# Altium PCB INVERTER_USE_555_IC.PcbDoc
Units mil, origin at the board's own origin, x right, y up, seen from the top; angles counter-clockwise.
Board outline 3400 x 1800 mil, 2 copper layers (Top Layer, Bottom Layer); 17 components, 12 nets, 49 pads, 0 vias.
Unrouted connection lines stored in the file: 12.
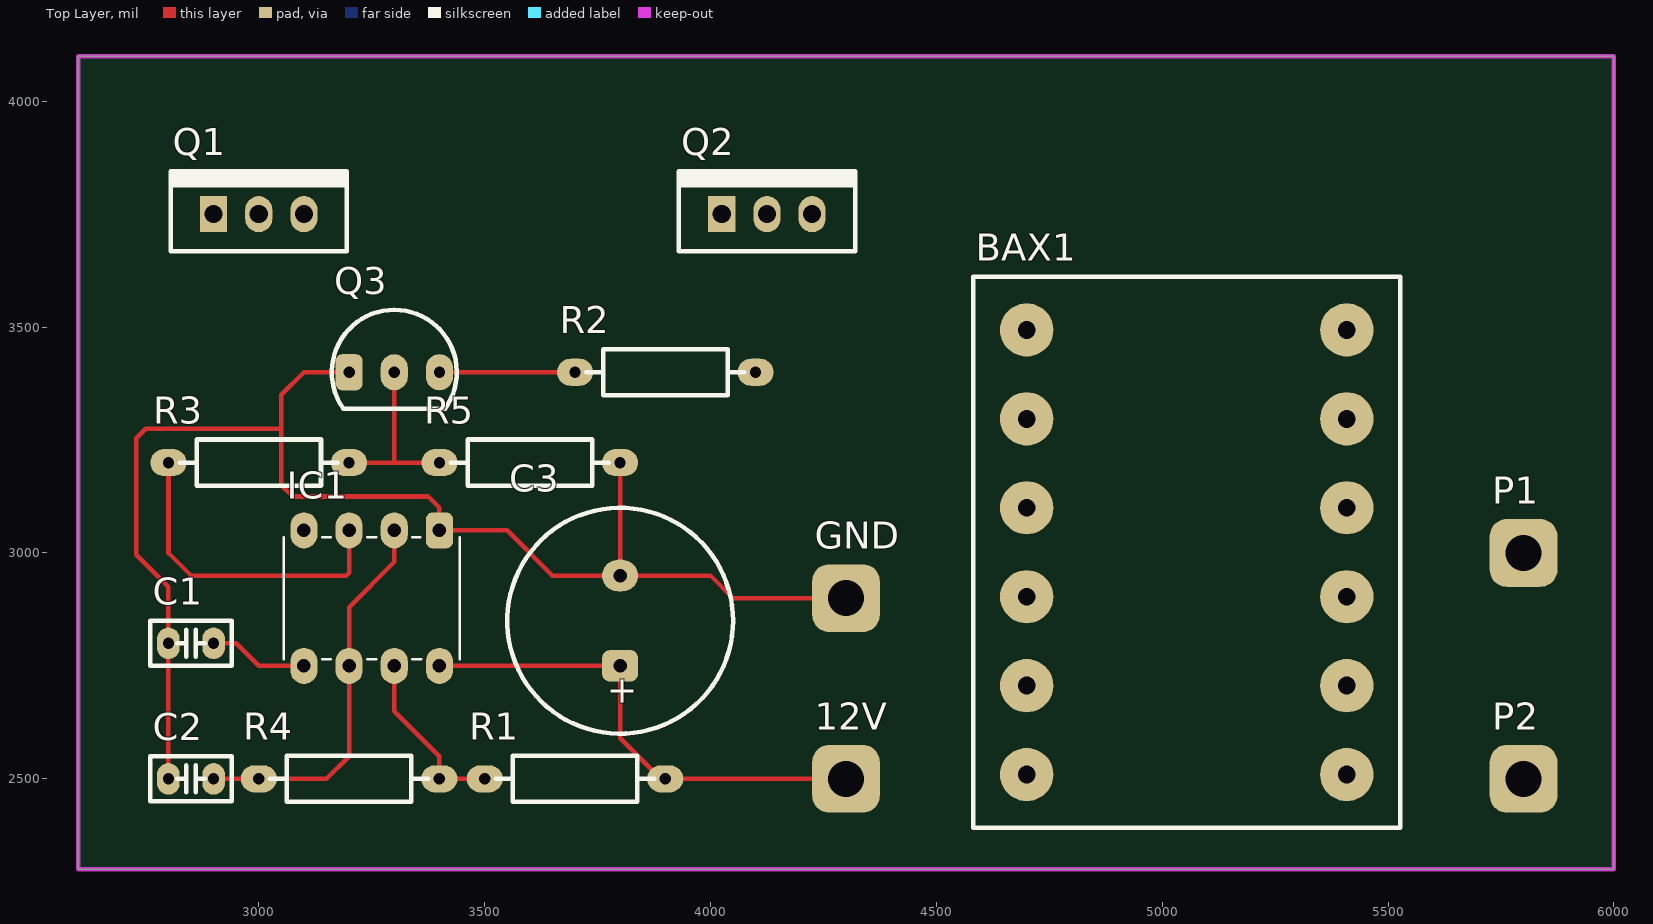
[diagram p0: Top Layer view]
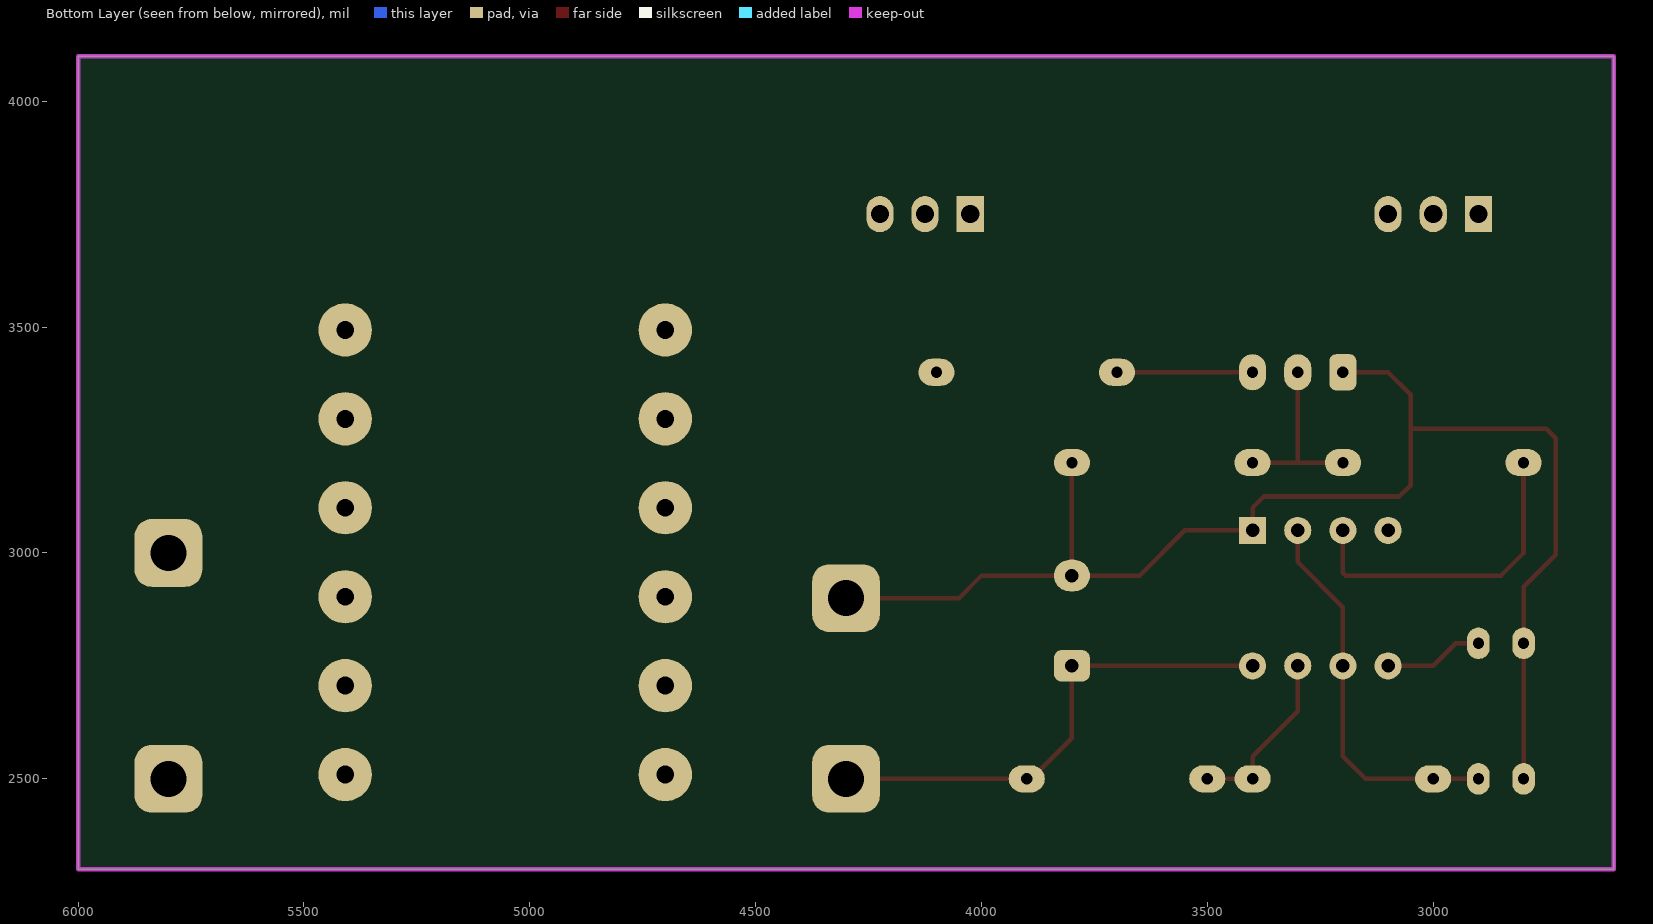
[diagram p1: Bottom Layer view, seen from below]

## Layer stack, top to bottom
Top Solder: solder mask 0.4, Solder Resist, Dk 3.5
Top Layer: signal copper 1.4
Dielectric 1: dielectric 12.6, FR-4, Dk 4.8
Bottom Layer: signal copper 1.4
Bottom Solder: solder mask 0.4, Solder Resist, Dk 3.5

## Board outline
2600,2300 6000,2300 6000,4100 2600,4100

## Design rules (kind name [scope] priority, off if disabled: settings)
Clearance [All] p1: gap=10 ignorepadtopadclearanceinfootprint=FALSE except(0: Arc-Hole Track-Hole SMDPad-Hole THPad-Hole Via-Hole Fill-Hole Poly-Hole Region-Hole Text-Hole)
PolygonConnect [All] p1: connectstyle=Relief reliefconductorwidth=10 reliefentries=4 polygonreliefangle="90 Angle" airgapwidth=10
RoutingVias [All] p1: holewidth=28 width=50 viastyle="Through Hole" minholewidth=28 minwidth=50 maxholewidth=28 maxwidth=50
SolderMaskExpansion [All] p1: expansion=4 istentingtop=FALSE
Width [All] p1: maxlimit=10 minlimit=10 preferedwidth=10
30 further rules are at their usual default settings.

## Components (designator, comment, footprint, x,y, rotation, side; value= is the part's Value field where it differs from the comment)
12V "SolderPoint" SolderPoint 4300,2500 r0 top
BAX1 "INVERTER" BAX_INVERTER 5054.33,2981.89 r0 top
C1 "100nF" CAP_Ceramic_Disc_2 2850,2800 r0 top
C2 "100pF" CAP_Ceramic_Disc_2 2850,2500 r0 top
C3 "100uF" CAP_RAD_5mm 3800,2850 r90 top
GND "SolderPoint" SolderPoint 4300,2900 r0 top
IC1 "NE555" N08E_TEX 3265,2895 r270 top
P1 "SolderPoint" SolderPoint 5800,3000 r0 top
P2 "SolderPoint" SolderPoint 5800,2500 r0 top
Q1 "IRFZ44N" TO-220A 3000,3750 r0 top
Q2 "IRFZ44N" TO-220A 4125,3750 r0 top
Q3 "2N3904" TO-92 3300,3400 r0 top
R1 "4K7" RES-0.25W-H-MF 3700,2500 r0 top
R2 "470" RES-0.25W-H-MF 3900,3400 r0 top
R3 "10K" RES-0.25W-H-MF 3000,3200 r180 top
R4 "10K" RES-0.25W-H-MF 3200,2500 r0 top
R5 "2K7" RES-0.25W-H-MF 3600,3200 r180 top

## Footprints (in the part's own frame and the unit in brackets; to place one, negate y for a bottom-side part, rotate by r counter-clockwise, add the part's x,y. Pads: shape width x height; smd on the part's side, far side on the other; paste and mask are expansions set on the pad)
BAX_INVERTER [mm]
  round 3 hole 1: 1(-9,13) 2(-9,8) 3(-9,3) 4(-9,-2) 5(-9,-7) 6(-9,-12) 7(9,-12) 8(9,-7) 9(9,-2) 10(9,3) 11(9,8) 12(9,13)
  silkscreen extent -12,-15 12,16
CAP_Ceramic_Disc_2 [mil]
  oval 50x70 hole 25: 1(-50,0) 2(50,0)
  silkscreen extent -90,-50 90,50, body extent -92,-49 92,49, height 289
CAP_RAD_5mm [mil]
  rrect50% 70x80 hole 30: 1(-100,0)
  oval 70x80 hole 30: 2(100,0)
  silkscreen extent -250,-250 250,250, body extent -246,-246 246,246, height 788
N08E_TEX [mil]
  rrect50% 80x60 / inner rect 60x60 / far side rect 60x60 hole 30 mask+0: 1(-155,135)
  oval 80x60 / inner round 60 / far side round 60 hole 30 mask+0: 2(-155,35) 3(-155,-65) 4(-155,-165) 5(145,-165) 6(145,-65) 7(145,35) 8(145,135)
  silkscreen extent -140,-210 130,180, body extent -165,-205 155,175, height 215
RES-0.25W-H-MF [mil]
  oval 80x60 hole 25: 1(-199.8,0) 2(199.8,0.01)
  silkscreen extent -175,-51 175,51, body extent -211,-51 211,51, height 106
SolderPoint [mil]
  rrect50% 150x150 hole 80: 1(0,0)
TO-92 [mil]
  rrect50% 60x80 hole 25: 1(-100,0)
  oval 60x80 hole 25: 2(0,0) 3(100,0)
  silkscreen extent -138,-81 138,138, body extent -109,-48 109,93, height 298
TO-220A [mil]
  rect 60x80 hole 40: 1(-100,0)
  oval 60x80 hole 40: 2(0,0) 3(100,0)
  silkscreen extent -195,-82 195,95, body extent -195,-82 195,95, height 810

## Part data
BAX1: library part BAX_INVERTER
C1 C2: library part Capacitors(Disc)
C3: library part Capacitor(Radian)
Q3: library part "2N3904 (TO-92)"
R1 R2 R3 R4 R5: library part "Resistors THD"

## Nets (pads, with @x,y where several pads share a name; then routed paths per layer and width w, separated by ;. In a path a pad name is that pad's centre, name@x,y a point inside that pad or via, vN(x,y) a via of type N, cw(c..) or ccw(c..) an arc to the next point about the centre after c; other vN are vias at no path point)
GND: C1.1 C2.1 C3.2 GND.1 IC1.1 Q1.3 Q2.3 Q3.1 R5.1 | length 3116.6
  Top Layer w10: C2.1 C1.1 2800,2925 2729.14,2995.86 2729.14,3254.14 2750,3275 3050,3275 ; Q3.1 3100,3400 3050,3350 3050,3275 ; R5.1 3799.9,3199.9 3799.9,2950.1 C3.2 ; GND.1 4050,2900 4000,2950 C3.2 ; 3050,3275 3050,3150 3075,3125 3375,3125 3400,3100 IC1.1 3550,3050 3650,2950 C3.2
Net12V_1: 12V.1 BAX1.3 BAX1.4 C3.1 IC1.4 IC1.8 R1.2 R2.2 | length 1097.4
  Top Layer w10: IC1.8 C3.1 3800,2589.81 3889.8,2500.01 R1.2 12V.1
NetBAX1_1: BAX1.1 Q1.2
NetBAX1_6: BAX1.6 Q2.2
NetBAX1_7: BAX1.7 P2.1
NetBAX1_8: BAX1.8 P1.1
NetC1_2: C1.2 IC1.5 | length 220.7
  Top Layer w10: C1.2 2950,2800 3000,2750 IC1.5
NetC2_2: C2.2 IC1.2 IC1.6 R4.1 | length 862.1
  Top Layer w10: C2.2 R4.1 3150,2500 3200,2550 IC1.6 3200,2880 3300,2980 IC1.2
NetIC1_3: IC1.3 Q1.1 R3.2 | length 717.2
  Top Layer w10: R3.2 2800.2,2999.8 2850,2950 3194.14,2950 3200,2955.86 IC1.3
NetIC1_7: IC1.7 R1.1 R4.2 | length 391.7
  Top Layer w10: IC1.7 3300,2649.8 3399.8,2550 R4.2 R1.1
NetQ2_1: Q2.1 Q3.3 R2.1 | length 300.2
  Top Layer w10: Q3.3 R2.1
NetQ3_2: Q3.2 R3.1 R5.2 | length 400.4
  Top Layer w10: R3.1 3300,3200 ; Q3.2 3300,3200 ; R5.2 3300,3200
pads on no net: BAX1.2 BAX1.5 BAX1.9 BAX1.10 BAX1.11 BAX1.12

## Keep-outs
Keep-Out Layer:
  the board outline again, w10

## Text inside footprints (layer, text, board x,y; h text height)
C3: Top Overlay "+" at 3830,2660 h60 r90
IC1: Mechanical 13 "*" at 3375,3032.5 h50 r270